# Altium PCB 5VV10 AND BUCK_v2_SKM.PcbDoc
Units mm, origin at the board's own origin, x right, y up, seen from the top; angles counter-clockwise.
Board outline 100 x 100 mm, 2 copper layers (Top Layer, Bottom Layer); 23 components, 22 nets, 89 pads, 0 vias.
Unrouted connection lines stored in the file: 63.
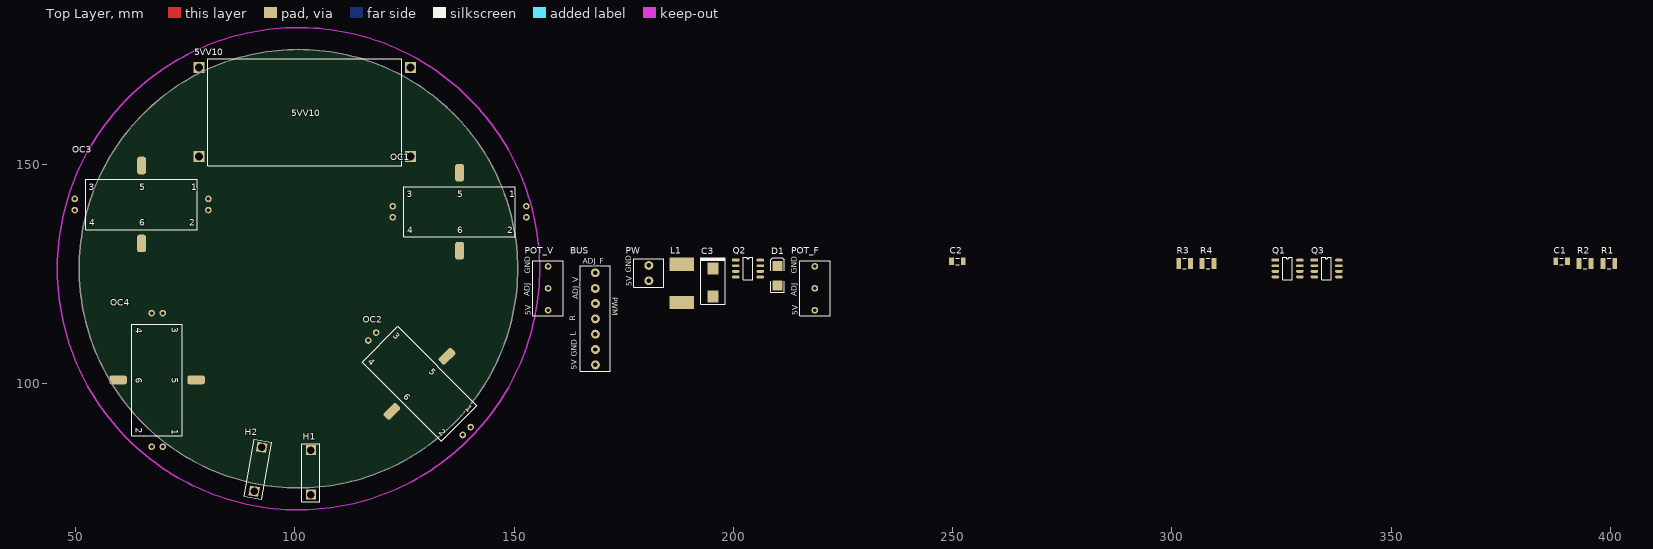
[diagram p0: Top Layer view]
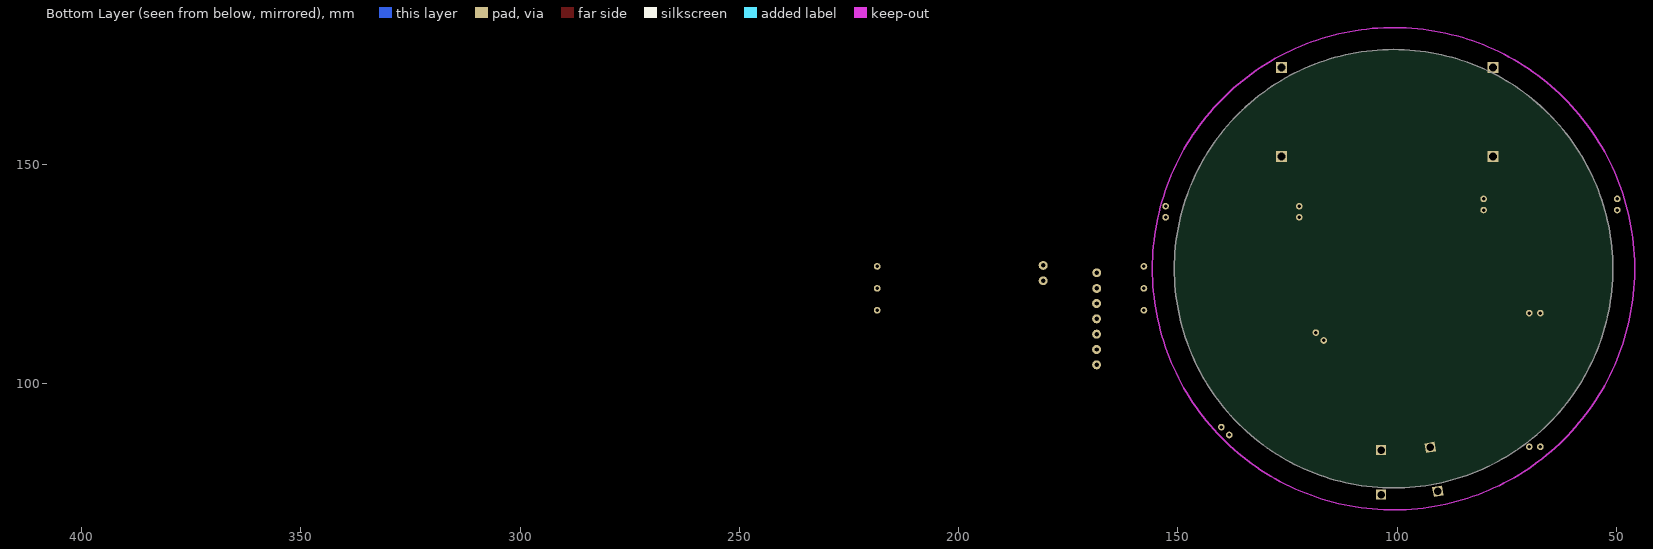
[diagram p1: Bottom Layer view, seen from below]

## Layer stack, top to bottom
Top Solder: solder mask 0.0102, Solder Resist, Dk 3.5
Top Layer: signal copper 0.0356
Dielectric 1: dielectric 0.32, FR-4, Dk 4.8
Bottom Layer: signal copper 0.0356
Bottom Solder: solder mask 0.0102, Solder Resist, Dk 3.5

## Board outline
136.155,90.845 ccw(c100.8,126.2) 100.8,176.2 ccw(c100.8,126.2) 136.121,90.81 ccw(c136.121,90.845)

## Design rules (kind name [scope] priority, off if disabled: settings)
Clearance [All] p1: gap=0.2 ignorepadtopadclearanceinfootprint=FALSE
PolygonConnect [All] p1: connectstyle=Relief reliefconductorwidth=0.254 reliefentries=4 polygonreliefangle="90 Angle" airgapwidth=0.254
RoomDefinition "5VV10 AND BUCK_v2" [InComponentClass('5VV10 AND BUCK_v2')] p1: confinementstyle=ConfineIn formatcopy=TRUE lockcomponents=FALSE outline 151.892,77.724 401.955,77.724 401.955,131.572 151.892,131.572
RoutingVias [All] p1: holewidth=0.6 width=1 viastyle="Through Hole" minholewidth=0.711 minwidth=1.27 maxholewidth=0.711 maxwidth=1.27
SolderMaskExpansion [All] p1: expansion=0.102
Width [All] p1: maxlimit=0.2 minlimit=0.2 preferedwidth=0.2
30 further rules are at their usual default settings.

## Components (designator, comment, footprint, x,y, rotation, side; value= is the part's Value field where it differs from the comment)
5VV10 "5VV10" PCBComponent_1#1 78.105,172.085 r270 top
BUS "BUS" WJ350_7_Pins 168.529,104.267 r0 top
C1 "Cap Semi" C1206 388.874,127.889 r0 top value=100pF
C2 "Cap Semi" C1206 251.079,127.889 r0 top value=100pF
C3 "Capacitor 220uF (Polarized)" "SMD 7343 - Pol" 195.326,123.063 r90 top value=220uF
D1 "D Schottky" SMB 210.058,124.587 r90 top
H1 "2mm Banana" PCBComponent_1#2 103.632,84.836 r180 top
H2 "2mm Banana" PCBComponent_1#2 90.678,75.438 r350 top
L1 "Inductor" PCBComponent_1#3 188.214,118.491 r0 top value=820uH
OC1 "Optocoupler" OC100G 137.541,139.192 r90 top
OC2 "Optocoupler" OC100G 128.397,99.949 r45 top
OC3 "Optocoupler" OC100G 65.024,140.843 r90 top
OC4 "Optocoupler" OC100G 68.58,100.838 r0 top
POT_F "POT" WJ350_3_Pins 218.567,116.713 r0 top
POT_V "POT" WJ350_3_Pins 157.734,116.713 r0 top
PW "PW" WJ350_2_Pins 180.721,123.444 r0 top
Q1 "Dual MOSFET" SO-8 323.596,128.143 r0 top
Q2 "Dual MOSFET" SO-8 200.533,128.143 r0 top
Q3 "Dual MOSFET" SO-8 332.486,128.143 r0 top
R1 "Res3" 14-1210 399.669,127.381 r0 top value=27
R2 "Res3" 14-1210 394.208,127.381 r0 top value=27
R3 "Res3" 14-1210 302.895,127.381 r0 top value=27
R4 "Res3" 14-1210 308.229,127.381 r0 top value=27

## Footprints (in the part's own frame and the unit in brackets; to place one, negate y for a bottom-side part, rotate by r counter-clockwise, add the part's x,y. Pads: shape width x height; smd on the part's side, far side on the other; paste and mask are expansions set on the pad)
14-1210 [mm] "Chip Resistor, Body 3.2x2.5mm, IPC High Density"
  rect 1.1x2.6 smd: 1(-1.35,0) 2(1.35,0)
  silkscreen extent -0.4,-1.2 0.4,1.2, body extent -1.68,-1.32 1.68,1.32, height 0.9
C1206 [mm] "Chip Capacitor, Body 3.2x1.6mm, IPC High Density"
  rect 1.1x1.7 smd: 1(-1.35,0) 2(1.35,0)
  silkscreen extent -0.4,-0.75 0.4,0.75, body extent -1.7,-0.9 1.7,0.9, height 1.3
OC100G [mm]
  round 1.5 hole 0.8: 1(1.27,-15.24) 2(-1.27,-15.24) 3(1.27,15.24) 4(-1.27,15.24)
  rrect50% 4x2 smd: 5(8.89,0) 6(-8.89,0)
  silkscreen extent -5.75,-12.75 5.75,12.75
PCBComponent_1#1 [mil]
  rect 100x100 hole 70: 1(0,0) 2(800,0) 3(800,1900) 4(0,1900)
  silkscreen extent -80,80 880,1820
PCBComponent_1#2 [mil]
  rect 90x90 hole 67: 1(0,400) 1(0,0)
  silkscreen extent -80,-58 80,462
PCBComponent_1#3 [mil]
  rect 220x120 smd: 1(0,0) 2(0,342)
SMB [mm] "DO-214-AA/SMB; 2 C-Bend Leads; Body 5.3 x 3.6 mm, inc. leads (LxW)"
  rect 2.3x2.3 smd: 1(-2.25,0) 2(2.25,0)
  silkscreen extent -3.8,-1.55 4.1,1.55
"SMD 7343 - Pol" [mm]
  rect 2.77x2.55 smd: 1(3.22,0) 2(-3.22,0)
  silkscreen extent -5,-2.8 5.6,2.8
SO-8 [mm]
  rect 1.75x0.67 smd: 1(0,0)
  oval 1.75x0.67 smd: 2(0,-1.27) 3(0,-2.54) 4(0,-3.81) 5(5.6,-3.81) 6(5.6,-2.54) 7(5.6,-1.27) 8(5.6,0)
  silkscreen extent 1.71,-4.44 3.89,0.64
WJ350_2_Pins [mil]
  round 80 hole 40: P1(0,0) P2(0,138)
  silkscreen extent -134,-60 134,200
WJ350_3_Pins [mil]
  round 60 hole 30: P1(0,0) P2(0,197) P3(0,394)
  silkscreen extent -137,-50 137,445
WJ350_7_Pins [mil]
  round 80 hole 40: P1(0,0) P2(0,138) P3(0,276) P4(0,413) P5(0,551) P6(-1,686) P7(-1,827)
  silkscreen extent -134,-59 134,889

## Part data
BUS: library part WJ350_6_Pins
C1 C2: "Capacitor (Semiconductor SIM Model)", LatestRevisionDate=29-May-2009, LatestRevisionNote="IPC-7351 Footprint Added.", PackageDescription="Chip Capacitor", PackageReference=C1206, Published=8-Jun-2000, Publisher="Altium Limited"
D1: "Schottky Diode", Code_JEDEC=DO-214-AA, LatestRevisionDate=17-Jul-2002, LatestRevisionNote="Re-released for DXP Platform.", PackageDescription="DO-214-AA/SMB; 2 C-Bend Leads; Body 5.3 x 3.6 mm, inc. leads (LxW)", PackageReference=SMB, Published=8-Jun-2000, Publisher="Altium Limited"
L1: library part 820u
OC1 OC2 OC3 OC4: "Manufacturer OC100G MPI distribution OC100G"
POT_F POT_V: library part WJ350_3_Pins
PW: library part WJ350_2_Pins
Q1 Q2 Q3: "Manufacturer FDS8858CZ Farnell 1498963"
R1 R2 R3 R4: "Resistor", LatestRevisionDate=29-May-2009, LatestRevisionNote="IPC-7351 Footprint Added.", PackageDescription="Chip Resistor", PackageReference=J1-0603, Published=8-Jun-2000, Publisher="Altium Limited"
5VV10: Mnf="Pico Electronics"
C3: LatestRevisionDate=17-Jul-2002, LatestRevisionNote="Re-released for DXP Platform.", PackageDescription="Polarized Capacitor (Radial); 2 Leads", PackageReference=RB7.6-15, Published=8-Jun-2000, Publisher="Altium Limited"

## Nets (pads, with @x,y where several pads share a name; then routed paths per layer and width w, separated by ;. In a path a pad name is that pad's centre, name@x,y a point inside that pad or via, vN(x,y) a via of type N, cw(c..) or ccw(c..) an arc to the next point about the centre after c; other vN are vias at no path point)
5V: BUS.P1 C1.2 C2.1 POT_F.P1 POT_V.P1 PW.P1 Q1.3 Q2.3 Q3.3 R1.2 R2.2
ADJ_F: BUS.P7 POT_F.P2
ADJ_V: BUS.P6 POT_V.P2
GND: 5VV10.1 5VV10.4 BUS.P2 C1.1 C2.2 C3.2 D1.1 OC2.3 OC2.6 OC4.3 OC4.6 POT_F.P3 POT_V.P3 PW.P2 Q1.1 Q3.1
HV: 5VV10.3 OC1.5 OC3.5
LEFT: BUS.P3 Q1.2 Q1.4
Net5VV10_2: 5VV10.2 C3.1 L1.2
NetD1_2: D1.2 L1.1 Q2.5 Q2.6
NetH1_1: H1.1 OC1.6 OC2.5
NetH2_1: H2.1 OC3.6 OC4.5
NetOC1_1: OC1.1 R1.1
NetOC1_2: OC1.2 OC1.4
NetOC1_3: OC1.3 Q1.5 Q1.6 Q1.7 Q1.8 R3.2
NetOC2_1: OC2.1 R3.1
NetOC2_2: OC2.2 OC2.4
NetOC3_1: OC3.1 R2.1
NetOC3_2: OC3.2 OC3.4
NetOC3_3: OC3.3 Q3.5 Q3.6 Q3.7 Q3.8 R4.2
NetOC4_1: OC4.1 R4.1
NetOC4_2: OC4.2 OC4.4
PWM: BUS.P5 Q2.4
RIGHT: BUS.P4 Q3.2 Q3.4
pads on no net: Q2.1 Q2.2 Q2.7 Q2.8

## Keep-outs
Keep-Out Layer:
  circle w0.3: c100.8,126.2 r55

## Dimensions
155.8,126.2 to 45.8,126.2 on Mechanical 1

## Text inside footprints (layer, text, board x,y; h text height)
BUS: Top Overlay "ADJ_V" at 164.643,119.253 h1.27 r90; Top Overlay "PWM" at 172.364,119.685 h1.27 r270.34; Top Overlay "R" at 163.982,114.275 h1.27 r90; Top Overlay "L" at 164.059,110.871 h1.27 r90; Top Overlay "GND" at 164.236,106.096 h1.27 r90; Top Overlay "5V" at 164.236,103.099 h1.27 r90; Top Overlay "ADJ_F" at 165.659,127.381 h1.27
OC1: Top Overlay "1" at 148.841,142.492 h1.52; Top Overlay "2" at 148.441,134.292 h1.52; Top Overlay "5" at 137.041,142.492 h1.52; Top Overlay "6" at 137.041,134.292 h1.52; Top Overlay "3" at 125.541,142.492 h1.52; Top Overlay "4" at 125.641,134.292 h1.52
OC2: Top Overlay "1" at 138.721,94.292 h1.52 r315; Top Overlay "2" at 132.64,88.777 h1.52 r315; Top Overlay "5" at 130.377,102.636 h1.52 r315; Top Overlay "6" at 124.579,96.838 h1.52 r315; Top Overlay "3" at 122.245,110.768 h1.52 r315; Top Overlay "4" at 116.518,104.899 h1.52 r315
OC3: Top Overlay "1" at 76.324,144.143 h1.52; Top Overlay "2" at 75.924,135.943 h1.52; Top Overlay "5" at 64.524,144.143 h1.52; Top Overlay "6" at 64.524,135.943 h1.52; Top Overlay "3" at 53.024,144.143 h1.52; Top Overlay "4" at 53.124,135.943 h1.52
OC4: Top Overlay "1" at 71.88,89.538 h1.52 r270; Top Overlay "2" at 63.68,89.938 h1.52 r270; Top Overlay "5" at 71.88,101.338 h1.52 r270; Top Overlay "6" at 63.68,101.338 h1.52 r270; Top Overlay "3" at 71.88,112.838 h1.52 r270; Top Overlay "4" at 63.68,112.738 h1.52 r270
POT_F: Top Overlay "5V" at 214.63,115.595 h1.27 r90; Top Overlay "GND" at 214.452,125.044 h1.27 r90; Top Overlay "ADJ" at 214.427,119.964 h1.27 r90
POT_V: Top Overlay "5V" at 153.797,115.595 h1.27 r90; Top Overlay "GND" at 153.619,125.044 h1.27 r90; Top Overlay "ADJ" at 153.594,119.964 h1.27 r90
PW: Top Overlay "GND" at 176.657,125.298 h1.27 r90; Top Overlay "5V" at 176.784,122.25 h1.27 r90